# Altium PCB imped_control.PcbDoc
Units mm, origin at the board's own origin, x right, y up, seen from the top; angles counter-clockwise.
Board outline 69.9 x 99.85 mm, 4 copper layers (Top Layer, InternalGND, Internal3V3, Bottom Layer), stack 1.563 mm thick; 37 components, 104 nets, 161 pads, 11 vias.
Unrouted connection lines stored in the file: 1.
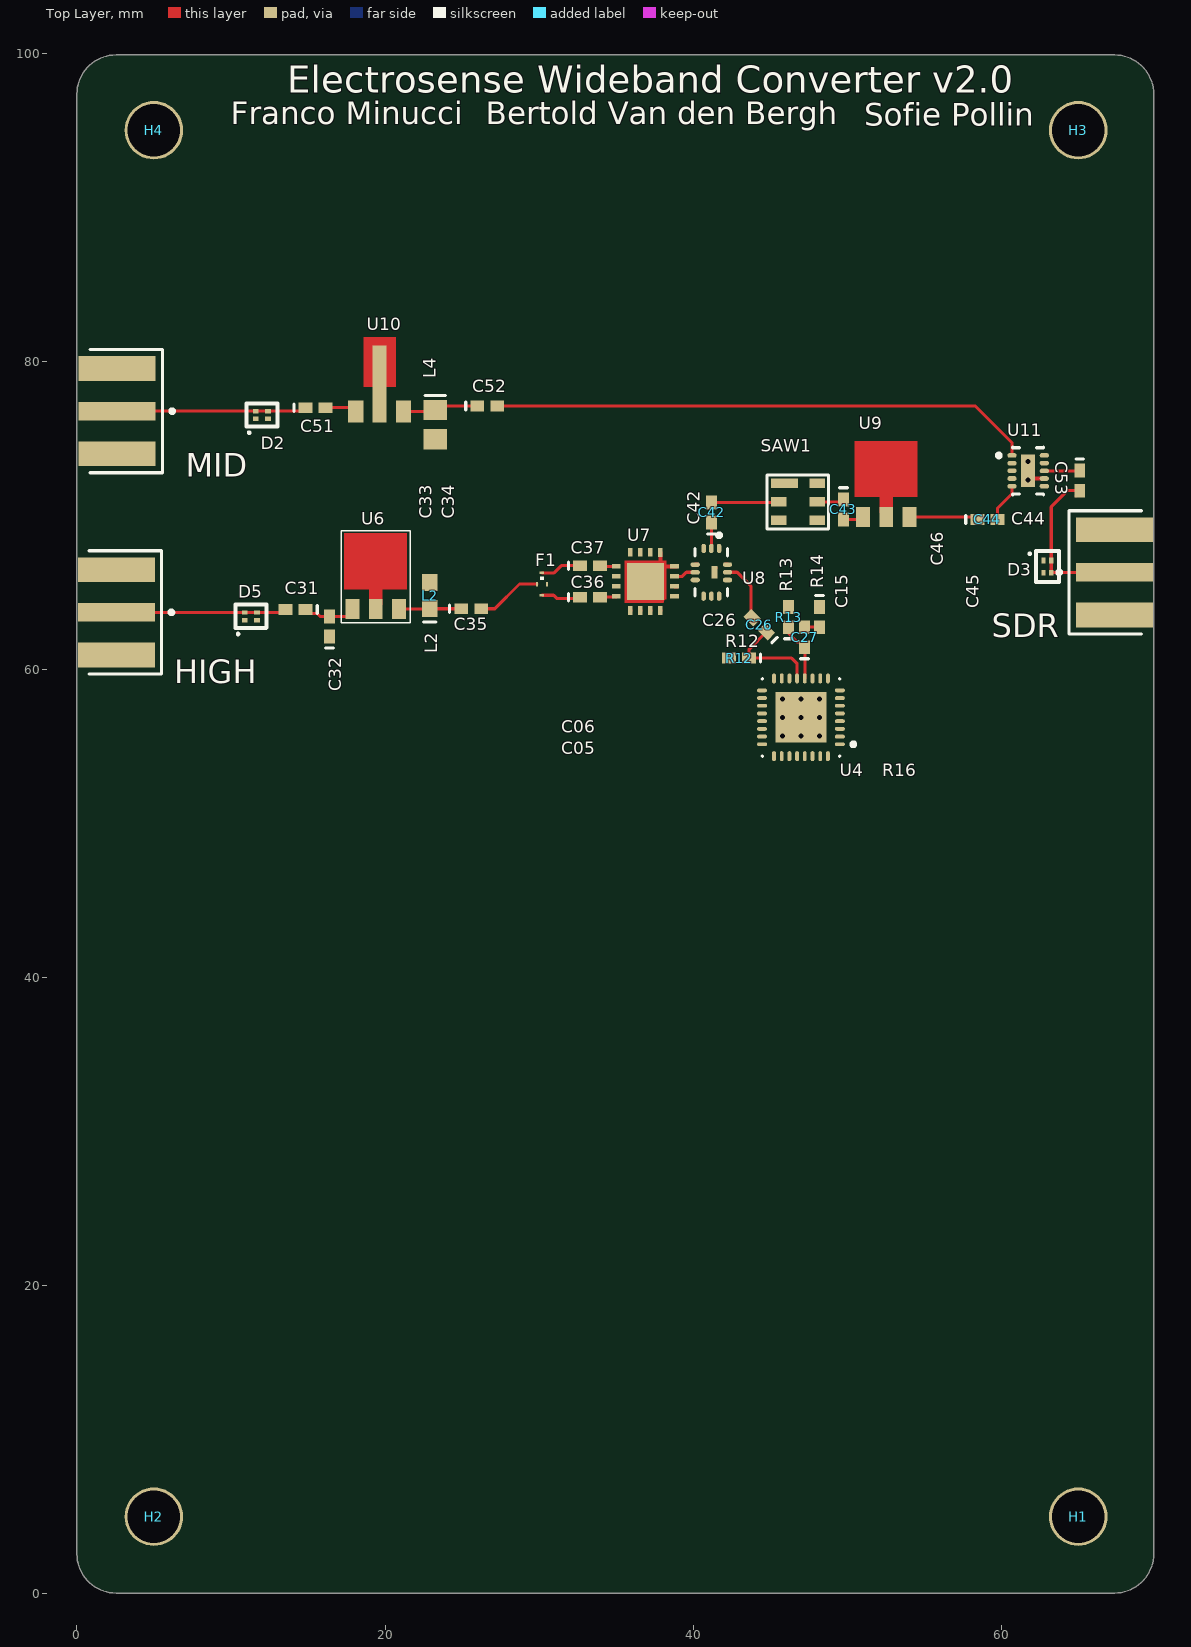
[diagram p0: Top Layer view]
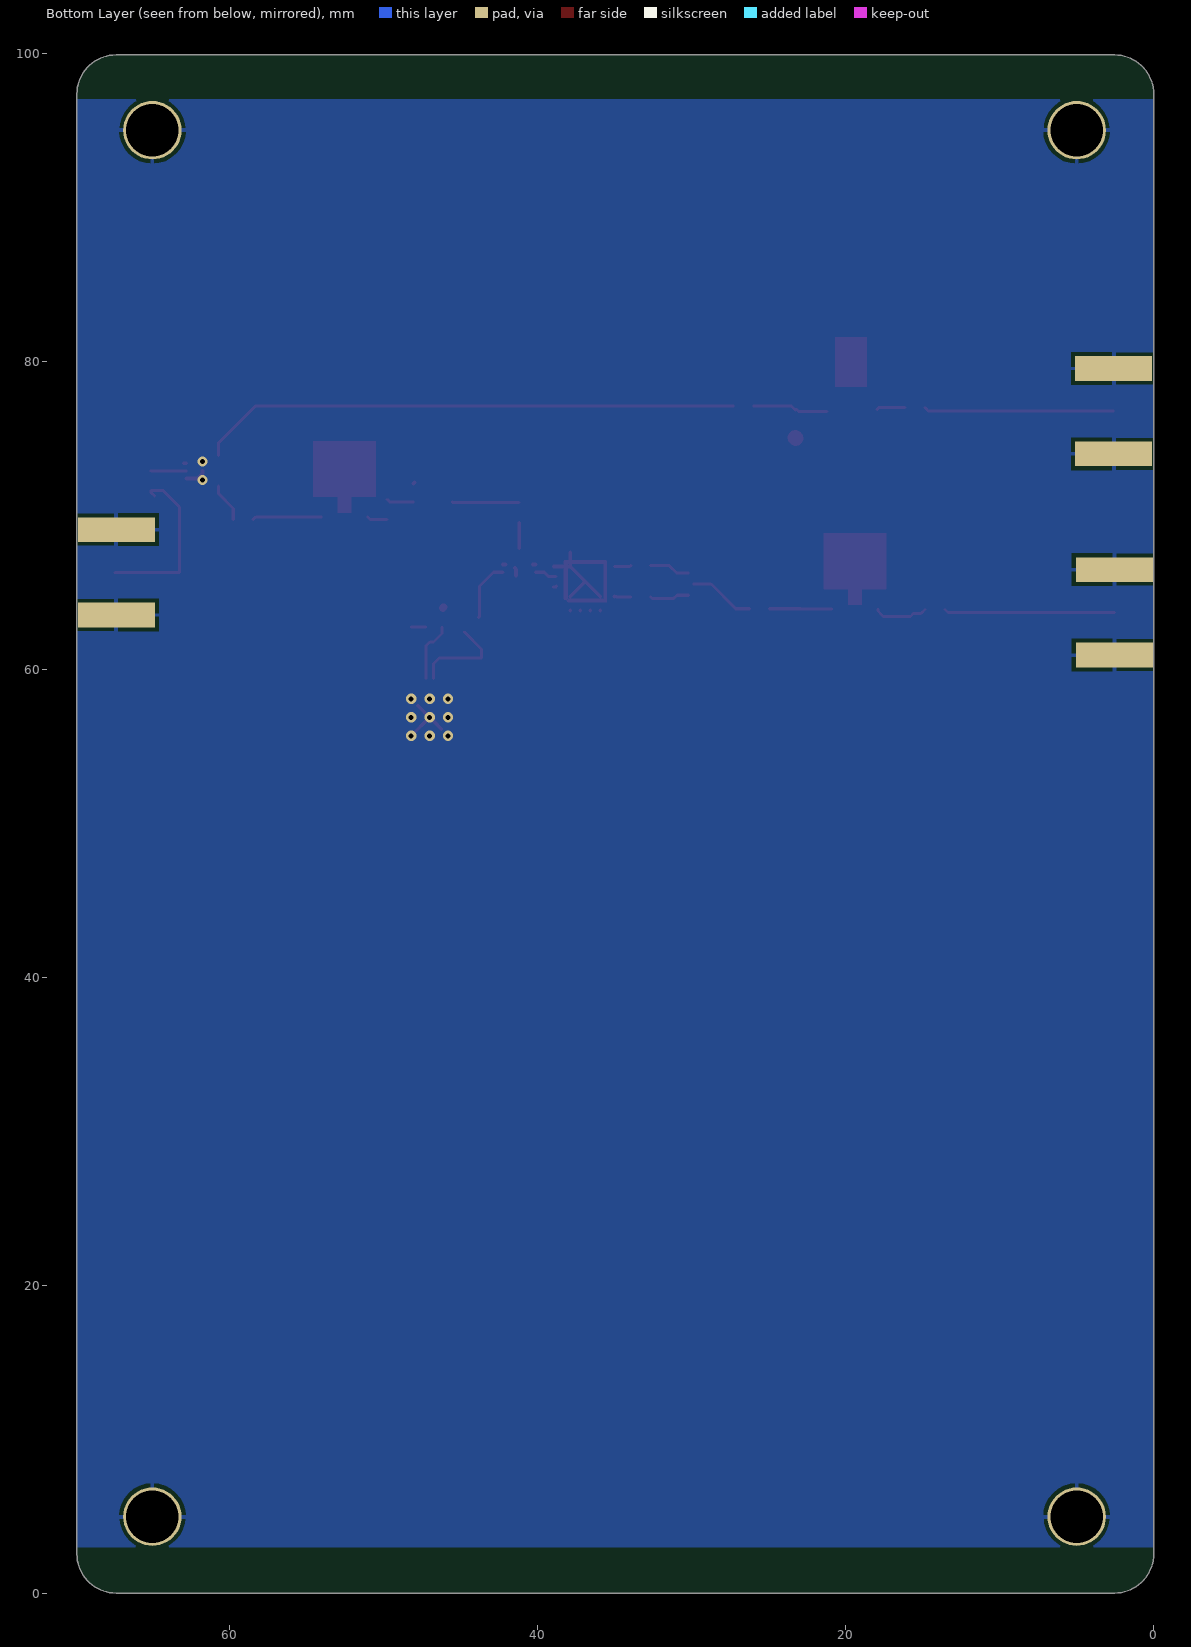
[diagram p1: Bottom Layer view, seen from below]
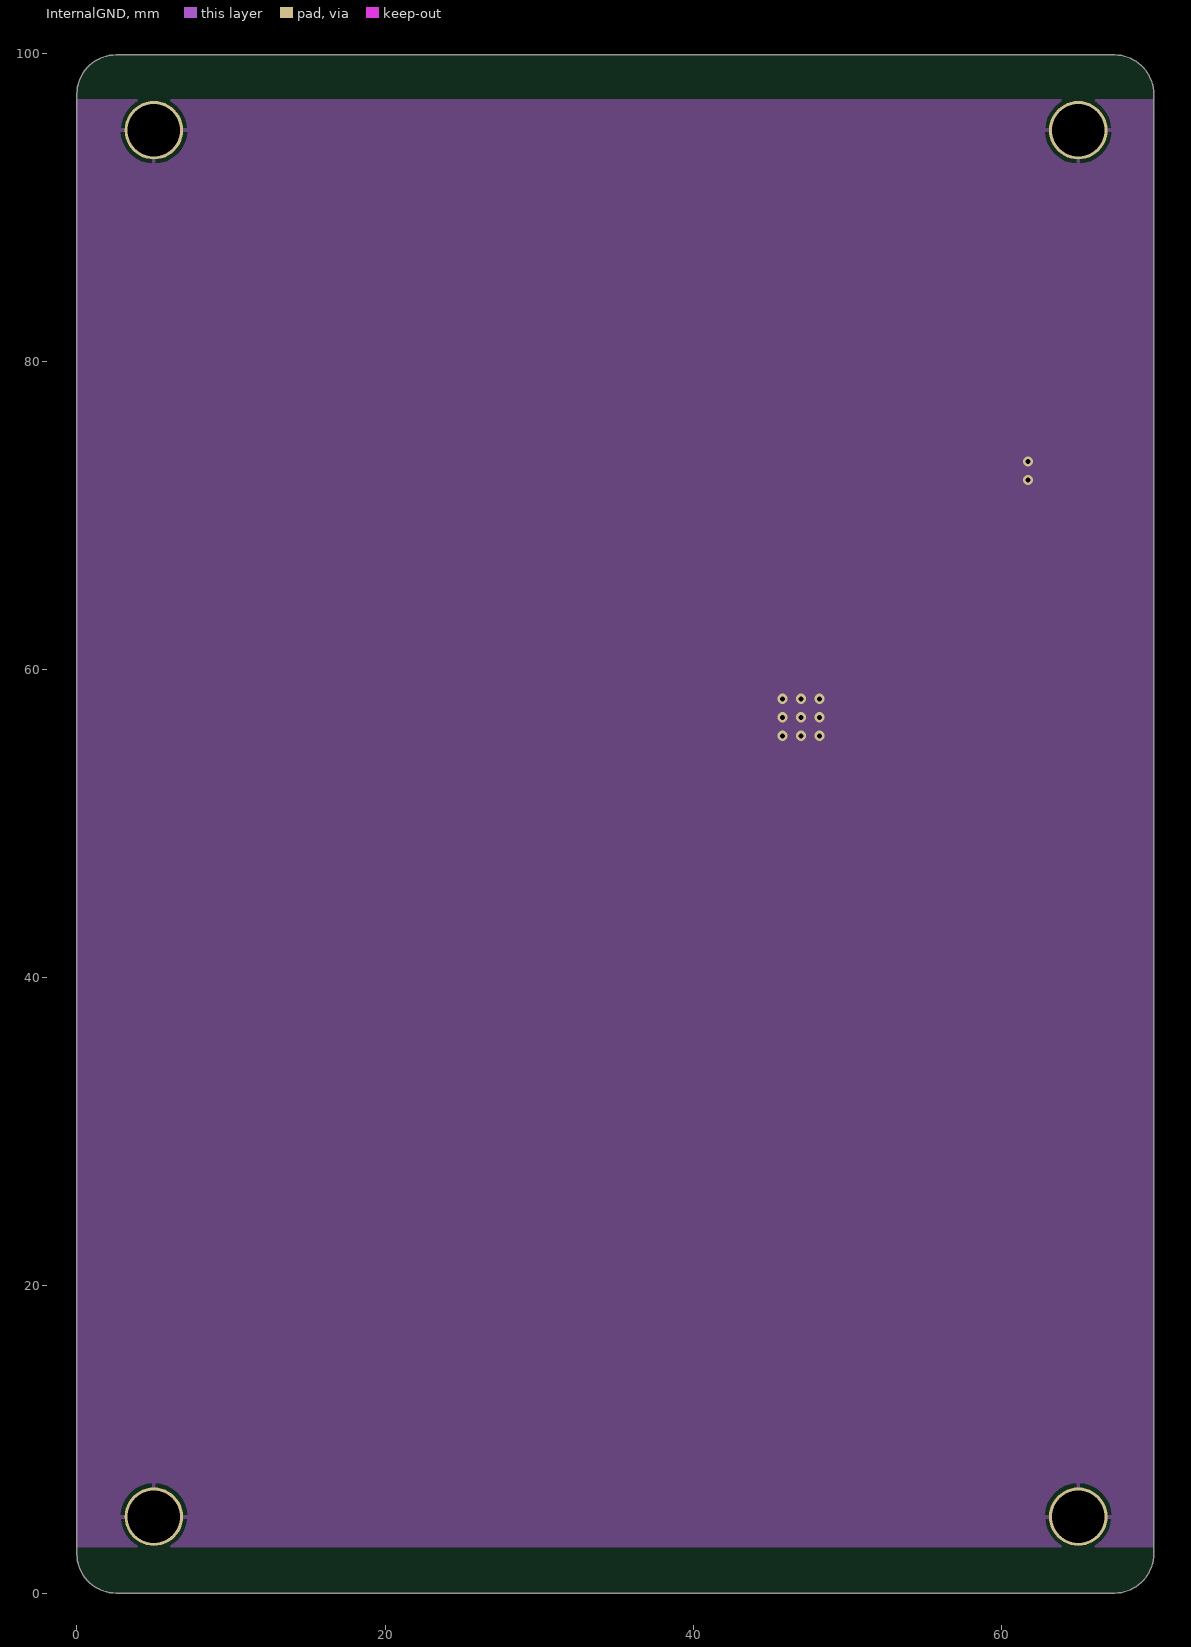
[diagram p2: InternalGND]
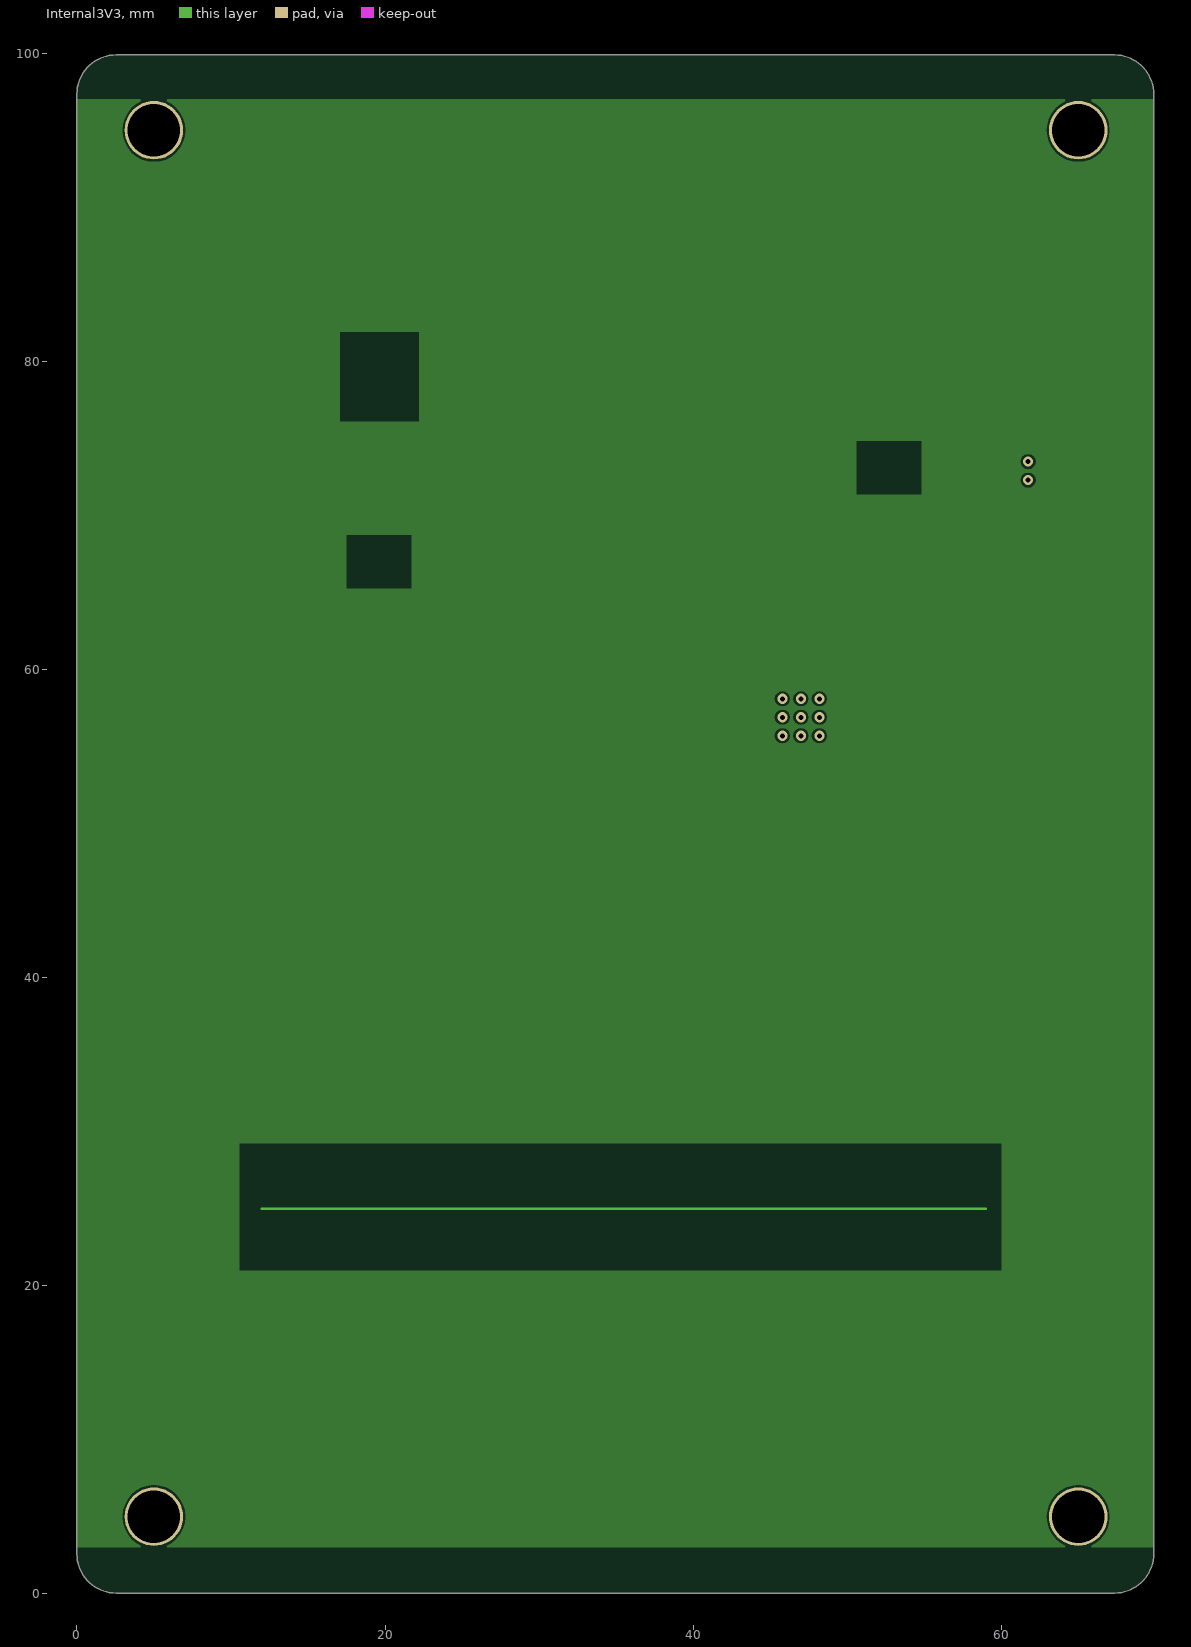
[diagram p3: Internal3V3]

## Layer stack, top to bottom
Top Solder: solder mask 0.0102, Solder Resist, Dk 3.5
Top Layer: signal copper 0.0356
Dielectric1: core 0.11, FR-4, Dk 4.29
InternalGND: signal copper 0.036
Dielectric5: prepreg 1.2, FR-4, Dk 3.96
Internal3V3: signal copper 0.036
Dielectric6: core 0.11, FR-4, Dk 4.29
Bottom Layer: signal copper 0.0356
Bottom Solder: solder mask 0.0102, Solder Resist, Dk 3.5

## Board outline
0,97.349 cw(c2.54,97.349) 2.54,99.889 67.36,99.889 cw(c67.36,97.349) 69.9,97.349 69.9,2.579 cw(c67.36,2.579) 67.36,0.039 2.54,0.039 cw(c2.54,2.579) 0,2.579

## Design rules (kind name [scope] priority, off if disabled: settings)
Clearance Clearance_1 [(InPolygon) vs InNetClass('RF')] p1: gap=0.25 ignorepadtopadclearanceinfootprint=FALSE except(0: Arc-Hole Track-Hole SMDPad-Hole THPad-Hole Via-Hole Fill-Hole Poly-Hole Region-Hole Text-Hole)
Clearance [All] p2: gap=0.15 ignorepadtopadclearanceinfootprint=FALSE except(0: Arc-Hole Track-Hole SMDPad-Hole THPad-Hole Via-Hole Fill-Hole Poly-Hole Region-Hole Text-Hole)
DiffPairsRouting [(InDifferentialPairClass('All Differential Pairs'))] p1: maxlimit=0.254 minlimit=0.254 mostfreqgap=0.254 toplayer_minwidth=0.381 toplayer_maxwidth=0.381 toplayer_prefwidth=0.381 midlayer1_minwidth=0.381 midlayer1_maxwidth=0.381 midlayer1_prefwidth=0.381 midlayer2_minwidth=0.381 midlayer2_maxwidth=0.381 midlayer2_prefwidth=0.381 bottomlayer_minwidth=0.381 bottomlayer_maxwidth=0.381 bottomlayer_prefwidth=0.381 maxuncoupledlength=12.7
HoleSize [All] p1: absolutevalues=TRUE maxlimit=3.5 minlimit=0.025 maxpercent=80.000 minpercent=20.000
MinimumAnnularRing [All] p1: minimumring=0.125
MinimumSolderMaskSliver [All] p1: minsoldermaskwidth=0
PlaneClearance [All] p1: clearance=0.2
PlaneConnect [All] p1: planeconnectstyle=Direct reliefexpansion=0.508 reliefentries=4 reliefconductorwidth=0.254 reliefairgap=0.254
PolygonConnect PolygonConnect_1 [(InPadClass('Direct') or isVia) vs InNet('GND')] p1: connectstyle=Direct reliefconductorwidth=0.254 reliefentries=4 polygonreliefangle="90 Angle" airgapwidth=0.254
PolygonConnect [All] p2: connectstyle=Relief reliefconductorwidth=0.254 reliefentries=4 polygonreliefangle="90 Angle" airgapwidth=0.254
RoutingLayers [All] p1: top layer_v5=TRUE mid layer 1_v5=FALSE mid layer 2_v5=FALSE bottom layer_v5=TRUE
RoutingVias [All] p1: holewidth=0.4 width=0.8 viastyle="Through Hole" minholewidth=0.25 minwidth=0.6 maxholewidth=2 maxwidth=2.5
SilkToSilkClearance [All] p1 off: silktosilkclearance=0.254
SilkToSolderMaskClearance SilkscreenOverComponentPads [IsPad] p1 off: minsilkscreentomaskgap=0.254 clearancetoexposedcopper=TRUE
SolderMaskExpansion [All] p1: expansion=0 istentingtop=FALSE
Width [InNetClass('RF')] p1: maxlimit=0.2 minlimit=0.098 preferedwidth=0.2 toplayer_minwidth=0.2 midlayer1_maxwidth=0.098 midlayer1_prefwidth=0.098 midlayer2_maxwidth=0.098 midlayer2_prefwidth=0.098 bottomlayer_minwidth=0.2 impedanceprofiledriven=TRUE impedanceprofileid={D2337405-BB80-458E-8EDF-B68371DB91AB} impedanceprofilevalue=50.000000 minimp=50.000000 maximp=50.000000 favimp=50.000000
Width Width_1 [All] p2: maxlimit=2.54 minlimit=0.16 preferedwidth=0.254 minimp=50.000000 maximp=50.000000 favimp=50.000000
22 further rules are at their usual default settings.

## Classes and differential pairs
net class RF: DOWNCONV_IN HIGH1 HIGH2 HIGH3 HIGH4 HIGH5 HIGH6 HIGH7 HIGH8 HIGH9 HIGH10 IMG_F_HIGH IMG_F_LOW LO+ LO- MID1 MID2 MID3 MID_IN OUT1 OUT2 RFOUTA+ RFOUTA-
component class U_CPU: C11CPU R02CPU R03CPU R04CPU R07CPU R08CPU
component class U_LO: C7 C018LO C019LO C020LO C26 C27 R1 R2 R3 R4 R5 R6 R9 R011LO R12 R13 R14 R039LO R040LO R041LO
component class U_MixerHF: C73HF C75HF C76HF C78HF C79HF C80HF C81HF C82HF C83HF C84HF L6HF L7HF L8HF L9HF L10HF
component class U_Mixer: C31 C32 C35 C36 C37 C42 C43 C44 C52 C53 C70 C71 C72 C102 C103 D3 D5 F1 HIGH L2 L4 MID R30 R32 SAW1 SDR U7 U8 U9 U10
pad class Direct: C52-1 C52-2 C70-1 C70-2 C71-1 C71-2 C72-1 C72-2 D3-1 D3-2 D3-3 D3-4 D5-1 D5-2 D5-3 D5-4 HIGH-1 HIGH-2 HIGH-3 HIGH-4 HIGH-5 L4-1 L4-2 R30-1 R30-2 R32-1 R32-2 SDR1-1 SDR1-2 SDR1-3 SDR1-4 SDR1-5 U20-1 U20-2 U20-3

## Components (designator, comment, footprint, x,y, rotation, side; value= is the part's Value field where it differs from the comment)
C26 "22pF" "smd C0402" 44.3,62.896 r135 top
C27 "22pF" "smd C0402" 47.236,62.089 r90 top
C31 "22pF" "smd C0402" 14.2,63.889 r180 top
C32 "" "smd C0402" 16.4,62.789 r90 top
C35 "22pF" "smd C0402" 25.6,63.939 r0 top
C36 "22pF" "smd C0402" 33.3,64.689 r0 top
C37 "22pF" "smd C0402" 33.3,66.734 r0 top
C42 "100pF" "smd C0402" 41.2,70.189 r90 top
C43 "CSMD402/100nF" "smd C0402" 49.761,70.389 r270 top
C44 "CSMD402/100nF" "smd C0402" 59.1,69.739 r0 top
C51 "CSMD402/100nF" "smd C0402" 15.49,76.989 r0 top
C52 "CSMD402/100nF" "smd C0402" 26.639,77.089 r0 top
C53 "100pF" "smd C0402" 65.1,72.25 r270 top
D2 "ESD0P8RFL" ESD0P8RFL 12.013,76.514 r270 top
D3 "ESD0P8RFL" ESD0P8RFL 63,66.677 r180 top
D5 "ESD0P8RFL" ESD0P8RFL 11.3,63.447 r270 top
F1 "DPX165850DT-8017A1" DPX165850DT-8017A1 29.786,66.339 r270 top
H1 "MOUNTHOLE_3MM" MOUNT_3MM#1 90.5,34.889 r0 top
H2 "MOUNTHOLE_3MM" MOUNT_3MM#2 5,34.889 r0 top
H3 "MOUNTHOLE_3MM" MOUNT_3MM#3 90.5,94.889 r0 top
H4 "MOUNTHOLE_3MM" MOUNT_3MM#4 7.6,96.989 r0 top
HIGH "CON-SMA-EDGE-S" FP-CON-SMA-EDGE-S-MFG -4.7,63.7 r90 top
L2 "SPL603/51nH" "smd C0603" 22.9,64.789 r90 top
L4 "SPL805/470nH" "smd C0805" 23.259,75.889 r270 top
MID "CON-SMA-EDGE-S" FP-CON-SMA-EDGE-S-MFG -4.654,76.764 r90 top
R12 "50R/402" "smd C0402_0.35" 42.986,60.731 r180 top
R13 "50R/402" "smd C0402_0.35" 46.2,63.389 r90 top
R14 "50R/402" "smd C0402_0.35" 48.2,63.389 r270 top
SAW1 "BR39162B3522U410" SAW_package 46.797,70.876 r90 top
SDR "CON-SMA-EDGE-S" FP-CON-SMA-EDGE-S-MFG 74.6,66.3 r270 top (schematic designator SDR1)
U4 "MAX2870" MAXIM-T3255 47,56.889 r180 top
U6 "SBB3089Z" LFCSP#1 19.4,66.339 r0 top
U7 "SKY13286-359LF" QFN-16_skyworks 36.9,65.714 r180 top
U8 "LTC5549" LTC5549 41.186,66.304 r270 top
U9 "ADL5602" LFCSP#1 52.536,72.328 r0 top
U10 "ADL5602" LFCSP#2 19.65,79.239 r0 top
U11 "SKY13322-375LF" QFN50P200X300X80-10N 61.75,72.889 r0 top

## Footprints (in the part's own frame and the unit in brackets; to place one, negate y for a bottom-side part, rotate by r counter-clockwise, add the part's x,y. Pads: shape width x height; smd on the part's side, far side on the other; paste and mask are expansions set on the pad)
DPX165850DT-8017A1 [mm] "Multilayer Diplexer"
  rect 0.15x0.3 smd: 1(0.075,0.4) 3(1.525,0.4)
  rect 0.3x0.15 smd: 2(0.8,0.075) 4(0.8,0.725)
  silkscreen extent 0.3,0.28 0.55,0.53
ESD0P8RFL [mm]
  rect 0.28x0.38 smd: 1(0.25,-0.4) 2(0.25,0.4) 3(-0.25,0.4) 4(-0.25,-0.4)
  silkscreen extent -0.76,-1 1.17,1
FP-CON-SMA-EDGE-S-MFG [mm]
  rect 1.2x5 smd paste+0 mask+0: 1(0,-7.26)
  rect 1.6x5 smd paste+0 mask+0: 2(-2.77,-7.26) 3(2.77,-7.26)
  rect 1.6x5 smd far side paste+0 mask+0: 4(-2.77,-7.26) 5(2.77,-7.26)
  silkscreen extent -4,-10.96 4,-5.5, body extent -3.67,-9.86 3.67,4.86, height 0.25
LFCSP#1 [mm]
  rect 0.9x1.3 smd: 1(-1.5,-2.425) 2(0,-2.425) 3(1.5,-2.425)
  Top Layer region: -2.05,-1.15 2.025,-1.15 2.025,2.5 -2.05,2.5
  Top Layer region: -0.45,-2.175 0.45,-2.175 0.45,-1.075 -0.45,-1.075
  silkscreen extent -2.25,-3.3 2.22,2.65
LFCSP#2 [mm]
  rect 1x1.4 smd: 1(-1.55,-2.5) 3(1.55,-2.5)
  rect 0.9x5 smd: 2(0,-0.7)
  Top Layer region: -1.05,-0.9 1.05,-0.9 1.05,2.35 -1.05,2.35
LTC5549 [mm] "QFN, 12-Leads, Body 2,1x3,1mm (max), Pitch 0,50mm, IPC Medium Density"
  oval 0.6x0.3 smd: 1(-1.55,0.5) 2(-1.55,0) 3(-1.55,-0.5) 7(1.55,-0.5) 8(1.55,0) 9(1.55,0.5)
  oval 0.3x0.6 smd: 4(-0.5,-1.05) 5(0,-1.05) 6(0.5,-1.05) 10(0.5,1.05) 11(0,1.05) 12(-0.5,1.05)
  rect 0.8x0.4 smd: 13(0,0.2)
  silkscreen extent -2.52,-1.05 1.55,1.05, body extent -1.55,-1.05 1.55,1.05, height 0.8
MAXIM-T3255 [mm] "QFN, 32-Leads, Body 5,0x5,0mm (max), Pitch 0,50mm, IPC Medium Density"
  oval 0.65x0.25 smd: 1(-2.525,1.75) 2(-2.525,1.25) 3(-2.525,0.75) 4(-2.525,0.25) 5(-2.525,-0.25) 6(-2.525,-0.75) 7(-2.525,-1.25) 8(-2.525,-1.75) 17(2.525,-1.75) 18(2.525,-1.25) 19(2.525,-0.75) 20(2.525,-0.25) 21(2.525,0.25) 22(2.525,0.75) 23(2.525,1.25) 24(2.525,1.75)
  oval 0.25x0.65 smd: 9(-1.75,-2.525) 10(-1.25,-2.525) 11(-0.75,-2.525) 12(-0.25,-2.525) 13(0.25,-2.525) 14(0.75,-2.525) 15(1.25,-2.525) 16(1.75,-2.525) 25(1.75,2.525) 26(1.25,2.525) 27(0.75,2.525) 28(0.25,2.525) 29(-0.25,2.525) 30(-0.75,2.525) 31(-1.25,2.525) 32(-1.75,2.525)
  rect 3.3x3.3 smd: 33(0,0)
  silkscreen extent -3.53,-2.52 2.52,2.53, body extent -2.5,-2.5 2.5,2.5, height 1
MOUNT_3MM#1 [mm]
  round 3.8 hole 3.4 paste-100 mask-100: 0(-25.5,-29.889)
MOUNT_3MM#2 [mm]
  round 3.8 hole 3.4 paste-100 mask-100: 0(0,-29.889)
MOUNT_3MM#3 [mm]
  round 3.8 hole 3.4 paste-100 mask-100: 0(-25.5,0.111)
MOUNT_3MM#4 [mm]
  round 3.8 hole 3.4 paste-100 mask-100: 0(-2.6,-1.989)
QFN50P200X300X80-10N [mm] "QFN, 10-Leads, Body 3,0x2,0mm (max), Pitch 0,50mm, IPC Medium Density"
  oval 0.6x0.3 smd: 1(-1.05,1) 2(-1.05,0.5) 3(-1.05,0) 4(-1.05,-0.5) 5(-1.05,-1) 6(1.05,-1) 7(1.05,-0.5) 8(1.05,0) 9(1.05,0.5) 10(1.05,1)
  rect 0.9x2.1 smd: 11(0,0)
  silkscreen extent -2.02,-1.55 1,1.55, body extent -1,-1.5 1,1.5, height 0.8
QFN-16_skyworks [mm]
  rect 0.575x0.3 smd: 1(-1.887,0.975) 2(-1.887,0.324) 3(-1.887,-0.325) 4(-1.887,-0.975) 9(1.887,-0.975) 10(1.887,-0.325) 11(1.887,0.327) 12(1.889,0.975)
  rect 0.3x0.575 smd: 5(-0.975,-1.886) 6(-0.325,-1.888) 7(0.325,-1.888) 8(0.975,-1.888) 13(0.975,1.889) 14(0.325,1.889) 15(-0.326,1.887) 16(-0.975,1.888)
  rect 2.4x2.4 smd: 17(0,0)
  Top Layer region: -1.15,1.125 1.35,1.125 1.35,1.35 -1.15,1.35
  Top Layer region: 1.175,-1.35 1.35,-1.35 1.35,1.125 1.175,1.125
  Top Layer region: -1.35,-1.35 1.175,-1.35 1.175,-1.125 -1.35,-1.125
  Top Layer region: -1.35,-1.225 -1.125,-1.225 -1.125,1.15 -1.35,1.15
  Top Layer region: -1.306,1.15 -1.19,1.15 -1.19,1.156 -1.306,1.156
  Top Layer region: -1.289,1.154 -1.188,1.154 -1.188,1.162 -1.289,1.162
  Top Layer region: -1.269,1.157 -1.182,1.157 -1.182,1.169 -1.269,1.169
  Top Layer region: -1.257,1.166 -1.175,1.166 -1.175,1.175 -1.257,1.175
  Top Layer region: -1.245,1.173 -1.181,1.173 -1.181,1.181 -1.245,1.181
  Top Layer region: -1.24,1.178 -1.185,1.178 -1.185,1.185 -1.24,1.185
  Top Layer region: -1.231,1.183 -1.19,1.183 -1.19,1.191 -1.231,1.191
  Top Layer region: -1.223,1.187 -1.193,1.187 -1.193,1.195 -1.223,1.195
  Top Layer region: -1.219,1.187 -1.187,1.187 -1.187,1.202 -1.219,1.202
  Top Layer region: -1.213,1.197 -1.149,1.197 -1.149,1.209 -1.213,1.209
  Top Layer region: -1.205,1.201 -1.124,1.201 -1.124,1.214 -1.205,1.214
  Top Layer region: -1.198,1.203 -1.119,1.203 -1.119,1.223 -1.198,1.223
  Top Layer region: -1.192,1.214 -1.127,1.214 -1.127,1.231 -1.192,1.231
  Top Layer region: -1.184,1.22 -1.131,1.22 -1.131,1.24 -1.184,1.24
  Top Layer region: -1.18,1.229 -1.131,1.229 -1.131,1.247 -1.18,1.247
  Top Layer region: -1.178,1.235 -1.13,1.235 -1.13,1.251 -1.178,1.251
  Top Layer region: -1.171,1.246 -1.133,1.246 -1.133,1.267 -1.171,1.267
  Top Layer region: -1.163,1.259 -1.142,1.259 -1.142,1.283 -1.163,1.283
  Top Layer region: -1.157,1.276 -1.146,1.276 -1.146,1.305 -1.157,1.305
  Top Layer lines w0.01: 1.35,1.35 0.975,1.35 0.325,1.35 -0.326,1.35 -0.975,1.35 -1.15,1.35 cw(c-1.35,1.35) -1.35,1.15 -1.35,-0.975 -1.35,-1.35 -0.975,-1.35 1.35,-1.35 1.35,1.35
SAW_package [mm]
  rect 0.6x1.75 smd: 1(1.2,0.875)
  rect 0.6x1 smd: 2(0,1.25) 2(0,1.25) 3(-1.2,1.25) 4(-1.2,-1.25) 5(0,-1.25) 6(1.2,-1.25)
  silkscreen extent -1.75,-2 1.75,2
"smd C0402" [mm] "Chip Capacitor; Body 1.0 x 0.5 mm (LxW typ)"
  rect 0.9x0.7 smd: 1(-0.65,0) 2(0.65,0)
  silkscreen extent -1.4,-0.25 -1.4,0.25
"smd C0402_0.35" [mm] "Chip Capacitor; Body 1.0 x 0.5 mm (LxW typ)"
  rect 0.9x0.7 smd: 1(-0.65,0) 2(0.65,0)
  silkscreen extent -1.4,-0.25 -1.4,0.25
"smd C0603" [mm] "Chip Capacitor; Body 1.6 x 0.8 mm (LxW typ)"
  rect 1.1x1 smd: 1(-0.85,0) 2(0.85,0)
  silkscreen extent -1.7,-0.4 -1.7,0.4
"smd C0805" [mm] "Chip Capacitor; Body 2.0 x 1.2 mm (LxW typ)"
  rect 1.3x1.5 smd: 1(-0.95,0) 2(0.95,0)
  silkscreen extent -1.9,-0.65 -1.9,0.65

## Part data
C26 C27 C31 C35 C36 C37: library part CSMD402/22pF, "smd capaciteit, verp.0402, 22pF", Component Type=Standard, Part Number=CSMD402/22pF, Pin Count=2, Supplier 1=Farnell
  C26 C27 C31 C35: Designator=CSMD402/22pF
C32: library part CSMD402/1pF, "smd capaciteit, verp.0402, 1pF", Part Number=CSMD402/100nF, Component Type=Standard, Pin Count=2, Supplier 1=Farnell
C42 C53: library part CSMD402/100pF, "smd capaciteit, verp.0402, 100pF", Component Type=Standard, Part Number=CSMD402/100pF, Pin Count=2, Supplier 1=Farnell
C43 C44 C51 C52: "smd capaciteit, verp.0402, 100nF", Component Type=Standard, Part Number=CSMD402/100nF, Pin Count=2, Supplier 1=Farnell
  C43 C44: Designator=CSMD402/100nF
HIGH MID SDR: library part CMP-204357-000001-1, "CONN SMA JACK STR EDGE MNT", Frequency=18GHz, Manufacturer="RF Solutions Ltd.", Package=CONN_JACK, Automotive=No, Category=Conn, ComponentLink2Description=Datasheet, ComponentLink2URL=https://www.rfsolutions.co.uk/downloads/1498648656DS-CON-EDGE-SMA-4.pdf, Conn Orientation="Right Angle", Contact Material=Gold, Device Class L1=Connectors, Device Class L2="RF / Coaxial Connectors", Device Class L3=unset, Digikey Description="CONN SMA JACK STR EDGE MNT", Footprint Url=https://forum.upverter.com/uploads/default/original/3X/b/e/be75b907af57498775929d6d9099689c472e0307.pdf, Height=6.35mm, Impedance=50Ω, Is Female=yes, Lead Free=Yes, Manufacturer part number=CON-SMA-EDGE-S, Number Of Contacts=1, Octopart=https://octopart.com/con-sma-edge-s-rf+solutions-70967450, RoHS=TRUE, Shielding=true
L4: "smd spoel, verpakking 805, 470nH", Supplier 1=Farnell
R12 R13 R14: "weerstand SMD402, 50R", Supplier 1=Farnell
SAW1: "Saw Filter", Manufacturer=TDK, Manufacturer part number=B39162B3522U410
U6: "RF Amplifier", Manufacturer=rfmd/Qorvo, MPN=SBB3089ZSR
U7: "SPDT-J2/J1 to RFC", Manufacturer=Skyworks
U9 U10: "Gain block", Manufacturer="Analog Devices", Manufacturer part number=ADL5602ARKZ-R7
L2: Supplier 1=Farnell

## Via types
v1: diameter 0.66, hole 0.33, Top Layer to Bottom Layer, tented top, 11 vias

## Nets (pads, with @x,y where several pads share a name; then routed paths per layer and width w, separated by ;. In a path a pad name is that pad's centre, name@x,y a point inside that pad or via, vN(x,y) a via of type N, cw(c..) or ccw(c..) an arc to the next point about the centre after c; other vN are vias at no path point)
3V3: R12.2 R13.2 U4.6 U4.10 U4.16 U4.17 U4.26 U4.28 U4.32 U8.9 | length 0.1
  Top Layer w0.5: R13.2@46.1,64.039 R13.2@46.15,63.989
3V3RF_L01CPU: 
5V: L4.2 U7.1 | length 0
  Top Layer w1: L4.2@23.23,75.009 L4.2@23.259,75.039
BAND_SEL: U7.2 | length 0.2
  Top Layer w0.22: U7.2 38.827,65.35 U7.2@38.989,65.35
CE_U1: U4.4
CLK_LED: 
CPU_LOCK_LED: 
CPU_MIX_LED: 
CPU_OSC_IN: 
CPU_OSC_OUT: 
CPU_RX: 
CPU_SCL: 
CPU_SDA: 
CPU_TX: 
CPU_USB_LED: 
CS_PLL: 
CS_U1: U4.3
DOWNCONV_IN: C44.2 U11.5 | length 2.5
  Top Layer w0.2: C44.2 59.75,70.45 60.7,71.4 U11.5
GND: C32.1 D2.1 D2.2 D3.1 D3.2 D5.1 D5.2 F1.4 H1.0 H2.0 H3.0 H4.0 HIGH.2 HIGH.3 HIGH.4 HIGH.5 MID.2 MID.3 MID.4 MID.5 R14.1 SAW1.1 SAW1.3 SAW1.4 SAW1.6 SDR.2 SDR.3 SDR.4 SDR.5 U4.8 U4.9 U4.11 U4.18 U4.21 U4.27 U4.31 U4.33 U6.2 U7.4 U7.5 U7.6 U7.7 U7.8 U7.10 U7.11 U7.13 U7.14 U7.15 U7.16 U7.17 U8.1 U8.3 U8.4 U8.6 U8.10 U8.12 U8.13 U9.2 U10.2 U11.7 U11.11 | length 12.3
  Top Layer w0.25: U7.13 U7.13 ; U7.17@35.925,64.739 U7.17 ; U7.14 U7.14 U7.14 ; U7.15@37.225,63.826 U7.15 ; U7.17@37.875,64.739 U7.17 ; U7.5 37.875,67.064 U7.17@37.875,66.689 ; U7.4@38.925,66.689 U7.4 38.25,66.689 U7.17@37.876,66.689 ; U8.4@40.146,66.794 U8.4 U8.4@40.286,66.804 ; U8.13@41.386,66.104 U8.13 41.386,66.504 U8.13@41.461,66.579 ; U8.12@42.086,66.804 U8.12 U8.12@42.226,66.794 ; U4.33@46.25,56.139 46.75,56.639 v1(47,56.889) ; U4.33@47.75,57.639 v1(47,56.889) ; SAW1.6@47.996,72.128 SAW1.6 ; U4.33@48.25,55.639 v1(48.2,55.689) v1(47,56.889) ; U11.11 61.75,72.714 62.075,72.389 U11.7 ; U7.17 U7.17@37.875,66.689
  other v1: 45.8,55.689 47,55.689 45.8,56.889 48.2,56.889 45.8,58.089 47,58.089 48.2,58.089 61.75,72.289 61.75,73.489
GPS_RST: 
HIGH1: C31.2 D5.3 D5.4 HIGH.1 | length 11.1
  Top Layer w0.2: HIGH.1 2.563,63.697 D5.4 D5.3 13.358,63.697 C31.2
HIGH2: C31.1 C32.2 U6.1 | length 3.5
  Top Layer w0.2: C31.1 15.1,63.639 15.589,63.639 15.789,63.439 C32.2 17.55,63.439 17.9,63.789 U6.1
HIGH3: C35.1 L2.1 U6.3 | length 4.1
  Top Layer w0.2: U6.3 22.875,63.914 L2.1 C35.1
HIGH4: C35.2 F1.2 | length 4.3
  Top Layer w0.2: C35.2 27.133,63.939 28.733,65.539 F1.2
HIGH5: U7.3 U8.5 | length 1.5
  Top Layer w0.2: U7.3 39.295,66.039 39.56,66.304 U8.5
HIGH6: C42.1 U8.2 | length 1.7
  Top Layer w0.2: U8.2 41.186,69.525 C42.1
HIGH7: C42.2 SAW1.2 | length 4.4
  Top Layer w0.2: C42.2 45.51,70.839 SAW1.2@45.547,70.876
HIGH8: C43.1 SAW1.5 | length 1.8
  Top Layer w0.2: SAW1.5 49.599,70.876 C43.1
HIGH9: C43.2 U9.1 | length 1.3
  Top Layer w0.2: C43.2 50.872,69.739 U9.1
HIGH10: C44.1 U9.3 | length 4.5
  Top Layer w0.2: U9.3 58.286,69.903 C44.1
IMG_F_HIGH: C36.1 F1.3 | length 2.6
  Top Layer w0.2: F1.3 30.948,64.814 31.15,64.612 32.573,64.612 C36.1
IMG_F_LOW: C37.1 F1.1 | length 2.7
  Top Layer w0.2: F1.1 30.978,66.264 31.448,66.734 C37.1
LO+: C26.2 U8.11 | length 4
  Top Layer w0.2: U8.11 42.86,66.304 43.77,65.394 43.77,63.426 C26.2
LO-: C27.2 R14.2 | length 1
  Top Layer w0.2: C27.2 R14.2
MCO: 
MID1: C51.1 D2.3 D2.4 MID.1 | length 12.3
  Top Layer w0.2: MID.1 D2.4 D2.3 14.615,76.764 C51.1
MID2: C51.2 U10.1 | length 1.9
  Top Layer w0.2: C51.2 17.85,76.989 U10.1@17.975,76.864
MID3: C52.1 L4.1 U10.3 | length 4.9
  Top Layer w0.2: U10.3 23.059,76.739 L4.1@23.209,76.889 ; L4.1 23.509,77.089 C52.1
MID_IN: C52.2 U11.1 | length 35.2
  Top Layer w0.2: C52.2 58.329,77.089 60.7,74.718 U11.1
MIX_EN: U8.7
MIX_X2: U8.8
MOSI: 
MOSI_U1: U4.2
MUXOUT_U1: U4.30
NetC06_2: 
NetC20_2: U4.23
NetC21_2: U4.19
NetC22_2: U4.24
NetC23_2: U4.7
NetC24_1: 
NetC33_1: L2.2
NetC54_2: U11.4
NetC55_2: U11.2
NetC56_2: U11.9 | length 0.2
  Top Layer w0.22: U11.9@62.815,73.404 U11.9 U11.9@62.972,73.389
NetC57_2: 
NetC59_2: 
NetC60_2: 
NetC61_2: 
NetC65_2: 
NetC67_1: 
NetC68_1: 
NetC68_2: 
NetL5_2: 
NetLOCK_1: 
NetMIX_1: 
NetR01_2: 
NetR02_1: 
NetR08_2: U4.22
NetR10_2: U4.1
OUT1: C53.1 U11.8 | length 2.3
  Top Layer w0.2: U11.8@62.819,72.908 U11.8 65.089,72.889 C53.1
OUT2: C53.2 D3.3 D3.4 SDR.1 | length 11.2
  Top Layer w0.2: C53.2@64.85,71.25 65.1,71.5 C53.2 64.295,71.6 63.25,70.555 D3.4 D3.3 67.417,66.277 SDR.1@67.44,66.3
PLL_EN: 
PLL_MISO: 
PPS_IN: 
REF_PLL: U4.29
RFOUTA+: C26.1 R12.1 U4.13 | length 6.4
  Top Layer w0.2: C26.1 43.636,61.313 R12.1 46.394,60.731 46.75,60.375 U4.13
RFOUTA-: C27.1 R13.1 U4.12 | length 3.9
  Top Layer w0.2: R13.1 46.2,62.331 46.752,61.779 46.986,61.779 47.25,61.515 C27.1@47.25,61.425 ; C27.1 C27.1@47.25,61.425 ; U4.12 C27.1@47.25,61.425
SCK: 
SMA_SW: 
Stripline:  | length 47
  Internal3V3 w0.16: 12,25 59,25
SW_BYPASS: 
SW_MIX: 
SW_MIX_CPU: 
SW_U1: U4.5
SWCLK: 
SWDIO: 
T2_BASE: 
TUNE: U4.20
U15_INA: 
U15_INB: 
U15_OSCB: 
U15_OSCB_FILTERED: 
U15_OUTA: 
U15_OUTB: 
UPCONV_EN#: 
UPCONV_IN: U11.10
URFSW_J1: C36.2 U7.12 | length 1.1
  Top Layer w0.2: C36.2 34.823,64.689 34.874,64.739 U7.12
  Top Layer w0.25: U7.12@34.986,64.714 U7.12
URFSW_J2: C37.2 U7.9 | length 1.1
  Top Layer w0.2: C37.2 33.994,66.689 U7.9
USB_D+: 
USB_D+_CON: 
USB_D-: 
USB_D-_CON: 
USB_EN: 
X1_OUT: 
pads on no net: U4.14 U4.15 U4.25 U11.3 U11.6

## Polygon pours and split planes (outlines as drawn)
GND on Bottom Layer "GND_L04_P001" (solid, pour order 1): 0,97 69.9,97 69.9,3 0,3
GND on InternalGND "GND_L02_P002" (solid, pour order 2): 0,97 69.9,97 69.9,3 0,3
3V3 on Internal3V3 "3V3_L03_P003" (solid, pour order 3): 0,97 69.9,97 69.9,3 0,3

## Other copper
Internal3V3:
  pour cut-out: 54.809,74.8 54.809,71.381 50.631,71.381 50.612,71.4 50.612,74.8
  pour cut-out: 21.7,68.7 21.7,65.281 17.522,65.281 17.503,65.3 17.503,68.7
  pour cut-out: 17.1,81.9 22.2,81.9 22.2,76.1 17.1,76.1
  pour cut-out: 10.559,29.2 60,29.2 60,21 10.559,21

## Silkscreen, mask and mechanical layers (free items; w line width, h text height)
Top Overlay:
  text "Electrosense Wideband Converter v2.0" at 13.65,96.839 h3
  text "Franco Minucci" at 10,94.907 h2.5
  text "Bertold Van den Bergh" at 26.55,94.907 h2.5
  text "Sofie Pollin" at 51.1,94.789 h2.5
  text "C33" at 23.046,69.779 h0.8 r90
  text "C34" at 24.496,69.779 h0.8 r90
  text "C42" at 40.446,69.38 h0.8 r90
  text "C44" at 60.654,69.38 h0.8
  text "C46" at 56.229,66.738 h0.8 r90
  text "R13" at 46.446,65.054 h0.8 r90
  text "C15" at 50.046,63.954 h0.8 r90
  text "C45" at 58.546,63.954 h0.8 r90
  text "C26" at 40.584,62.785 h0.8
  text "R12" at 42.096,61.435 h0.8
  text "L2" at 23.405,61.043 h0.8 r90
  text "C06" at 31.454,55.873 h0.8
  text "C05" at 31.454,54.493 h0.8
  text "R16" at 52.29,53.054 h0.8
Top Paste:
  rectangle: 17.35,65.189 21.425,68.839
  rectangle: 50.486,71.178 54.561,74.828
Top Solder:
  rectangle: 17.35,65.189 21.425,68.839
  rectangle: 50.486,71.178 54.561,74.828
Outline:
  lines w0.05: 0,2.595 0.001,97.294 cw(c2.596,97.294) 2.596,99.889 67.305,99.889 cw(c67.305,97.294) 69.9,97.294 69.9,2.615 cw(c67.305,2.615) 67.305,0.02 2.596,0.04 cw(c2.596,2.635) 0.001,2.635